# Altium PCB PCB1.PcbDoc (part 2 of 2)
Units mil, origin at the board's own origin, x right, y up, seen from the top; angles counter-clockwise.
Board outline 6000 x 4000 mil, 2 copper layers (Top Layer, Bottom Layer); 5 components, 75 nets, 178 pads, 23 vias.
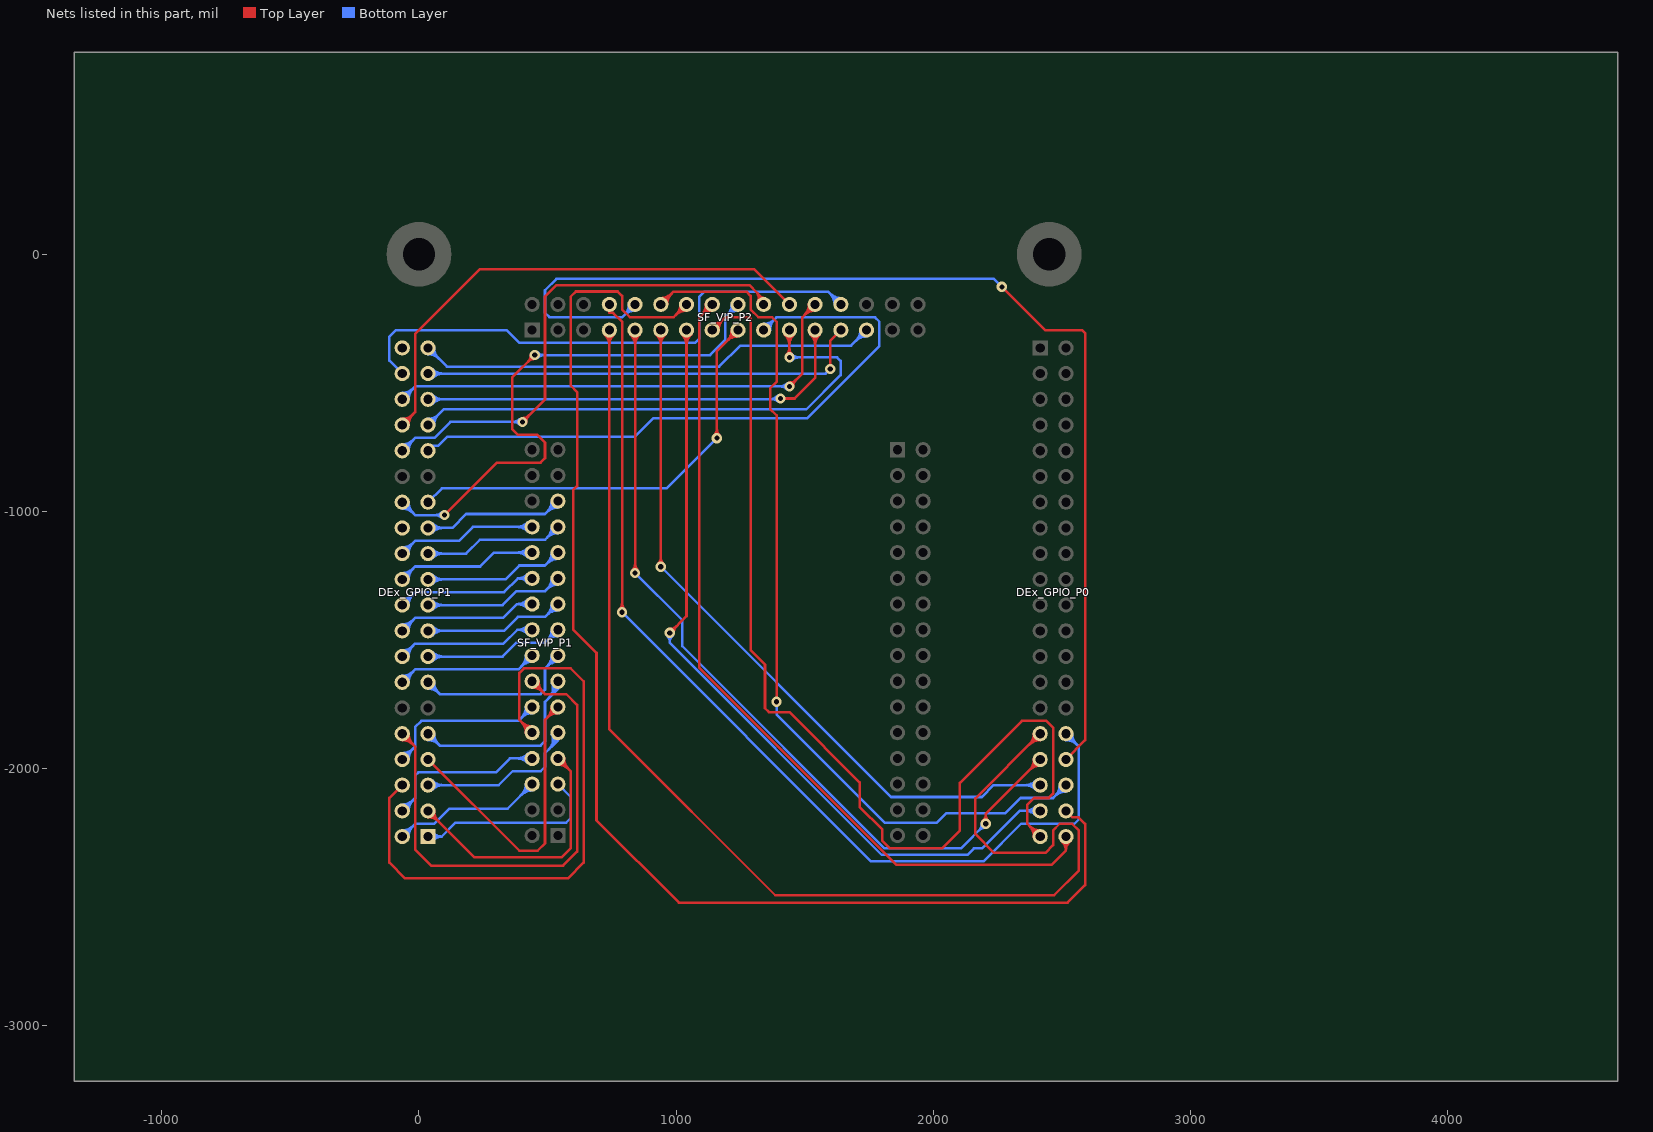
[diagram p2: the nets of this part, all layers, seen from the top]

## Via types
v1: diameter 40, hole 20, Top Layer to Bottom Layer, 23 vias

## Nets (pads, with @x,y where several pads share a name; then routed paths per layer and width w, separated by ;. In a path a pad name is that pad's centre, name@x,y a point inside that pad or via, vN(x,y) a via of type N, cw(c..) or ccw(c..) an arc to the next point about the centre after c; other vN are vias at no path point) (continued)
GPIO_0_26: DEx_GPIO_P0.31 SF_VIP_P2.7 | length 5153.7
  Top Layer w10: SF_VIP_P2.7@722.66,-312.34 cw(c680.79,-354.21) 740,-354.21 cw(c799.21,-354.21) SF_VIP_P2.7@757.34,-312.34 ; SF_VIP_P2.7@729.73,-305.27 cw(c704.93,-330.07) 740,-330.07 cw(c775.07,-330.07) SF_VIP_P2.7@750.27,-305.27 ; SF_VIP_P2.7@740,-295 740,-1847 1385,-2492 2469,-2492 2565,-2396 2565,-2240 2539,-2214 2491,-2214 2465,-2240 2465,-2297 2435,-2327 2236,-2327 2163,-2254 2163,-2116 DEx_GPIO_P0.31@2415,-1864 ; DEx_GPIO_P0.31@2390.47,-1864 cw(c2331.26,-1864) 2373.13,-1905.87 cw(c2415,-1947.74) DEx_GPIO_P0.31@2415,-1888.53 ; DEx_GPIO_P0.31@2400.47,-1864 cw(c2365.4,-1864) 2390.2,-1888.8 cw(c2415,-1913.6) DEx_GPIO_P0.31@2415,-1878.53
GPIO_0_27: DEx_GPIO_P0.32 SF_VIP_P2.8 | length 4028.4
  Top Layer w10: SF_VIP_P2.8@740,-195 740,-227.74 754.88,-227.74 789.53,-262.38 v1(789.53,-1391.7) ; v1@778.92,-1381.09 ccw(c753.31,-1355.48) 789.53,-1355.48 ccw(c825.74,-1355.48) v1@800.13,-1381.09
  Bottom Layer w10: v1(789.53,-1391.7) 1757.83,-2360 2194.57,-2360 2340.57,-2214 2547.5,-2214 2565,-2196.5 2565,-1914 DEx_GPIO_P0.32@2515,-1864 ; DEx_GPIO_P0.32@2515,-1888.53 cw(c2515,-1947.74) 2556.87,-1905.87 cw(c2598.74,-1864) DEx_GPIO_P0.32@2539.53,-1864 ; DEx_GPIO_P0.32@2515,-1878.53 cw(c2515,-1913.6) 2539.8,-1888.8 cw(c2564.6,-1864) DEx_GPIO_P0.32@2529.53,-1864
GPIO_0_28: DEx_GPIO_P0.33 SF_VIP_P2.9 | length 3654.2
  Top Layer w10: SF_VIP_P2.9@822.66,-312.34 cw(c780.79,-354.21) 840,-354.21 cw(c899.21,-354.21) SF_VIP_P2.9@857.34,-312.34 ; v1@829.39,-1228.3 ccw(c803.79,-1202.69) 840,-1202.69 ccw(c876.21,-1202.69) v1@850.61,-1228.3 ; SF_VIP_P2.9@829.73,-305.27 cw(c804.93,-330.07) 840,-330.07 cw(c875.07,-330.07) SF_VIP_P2.9@850.27,-305.27 ; v1(840,-1238.91) SF_VIP_P2.9@840,-295 ; v1@2192.39,-2203.39 ccw(c2166.79,-2177.79) 2203,-2177.79 ccw(c2239.21,-2177.79) v1@2213.61,-2203.39 ; v1(2203,-2214) 2203,-2176 DEx_GPIO_P0.33@2415,-1964 ; DEx_GPIO_P0.33@2390.47,-1964 cw(c2331.26,-1964) 2373.13,-2005.87 cw(c2415,-2047.74) DEx_GPIO_P0.33@2415,-1988.53 ; DEx_GPIO_P0.33@2400.47,-1964 cw(c2365.4,-1964) 2390.2,-1988.8 cw(c2415,-2013.6) DEx_GPIO_P0.33@2415,-1978.53
  Bottom Layer w10: v1(840,-1238.91) 1024.02,-1422.93 1024.02,-1524.02 1810,-2310 2107,-2310 v1(2203,-2214) ; v1@2188,-2214 cw(c2151.79,-2214) 2177.39,-2239.61 cw(c2203,-2265.21) v1@2203,-2229
GPIO_0_29: DEx_GPIO_P0.34 SF_VIP_P2.10 | length 4507.3
  Top Layer w10: v1(2266,-127) 2434,-295 2578,-295 2590,-307 2590,-1889 DEx_GPIO_P0.34@2515,-1964
  Bottom Layer w10: SF_VIP_P2.10@815.47,-195 cw(c756.26,-195) 798.13,-236.87 cw(c840,-278.74) SF_VIP_P2.10@840,-219.53 ; SF_VIP_P2.10@825.47,-195 cw(c790.4,-195) 815.2,-219.8 cw(c840,-244.6) SF_VIP_P2.10@840,-209.53 ; SF_VIP_P2.10@840,-195 790.47,-244.53 507.03,-244.53 490,-227.5 490,-140 534.53,-95.47 2234.47,-95.47 v1(2266,-127)
GPIO_0_30: DEx_GPIO_P0.35 SF_VIP_P2.11 | length 3137.9
  Top Layer w10: SF_VIP_P2.11@922.66,-312.34 cw(c880.79,-354.21) 940,-354.21 cw(c999.21,-354.21) SF_VIP_P2.11@957.34,-312.34 ; v1@929.39,-1204.39 ccw(c903.79,-1178.79) 940,-1178.79 ccw(c976.21,-1178.79) v1@950.61,-1204.39 ; SF_VIP_P2.11@929.73,-305.27 cw(c904.93,-330.07) 940,-330.07 cw(c975.07,-330.07) SF_VIP_P2.11@950.27,-305.27 ; v1(940,-1215) SF_VIP_P2.11@940,-295
  Bottom Layer w10: v1(940,-1215) 1835,-2110 2188,-2110 2234,-2064 DEx_GPIO_P0.35@2415,-2064 ; DEx_GPIO_P0.35@2397.66,-2081.34 ccw(c2355.79,-2123.21) 2355.79,-2064 ccw(c2355.79,-2004.79) DEx_GPIO_P0.35@2397.66,-2046.66 ; DEx_GPIO_P0.35@2404.73,-2074.27 ccw(c2379.93,-2099.07) 2379.93,-2064 ccw(c2379.93,-2028.93) DEx_GPIO_P0.35@2404.73,-2053.73
GPIO_0_31: DEx_GPIO_P0.36 SF_VIP_P2.12 | length 3753.4
  Top Layer w10: SF_VIP_P2.12@940,-195 989.53,-145.47 1272.5,-145.47 1289.53,-162.5 1289.53,-214.57 1319.96,-245 1372.5,-245 1390,-262.5 1390,-496 1365,-521 1365,-601 1390,-626 v1(1390,-1740) ; SF_VIP_P2.12@940,-180.47 ccw(c940,-145.4) 964.8,-170.2 ccw(c989.6,-195) SF_VIP_P2.12@954.53,-195 ; SF_VIP_P2.12@940,-170.47 ccw(c940,-111.26) 981.87,-153.13 ccw(c1023.74,-195) SF_VIP_P2.12@964.53,-195
  Bottom Layer w10: v1(1390,-1740) 1390,-1790 1810,-2210 2013,-2210 2049,-2174 2279,-2174 2339,-2114 2465,-2114 DEx_GPIO_P0.36@2515,-2064 ; DEx_GPIO_P0.36@2490.47,-2064 cw(c2431.26,-2064) 2473.13,-2105.87 cw(c2515,-2147.74) DEx_GPIO_P0.36@2515,-2088.53 ; DEx_GPIO_P0.36@2500.47,-2064 cw(c2465.4,-2064) 2490.2,-2088.8 cw(c2515,-2113.6) DEx_GPIO_P0.36@2515,-2078.53
GPIO_0_32: DEx_GPIO_P0.37 SF_VIP_P2.13 | length 3505
  Top Layer w10: v1(975,-1472) 1040,-1407 SF_VIP_P2.13@1040,-295 ; v1@975,-1457 ccw(c975,-1420.79) 1000.61,-1446.39 ccw(c1026.21,-1472) v1@990,-1472 ; SF_VIP_P2.13@1022.66,-312.34 cw(c980.79,-354.21) 1040,-354.21 cw(c1099.21,-354.21) SF_VIP_P2.13@1057.34,-312.34 ; SF_VIP_P2.13@1029.73,-305.27 cw(c1004.93,-330.07) 1040,-330.07 cw(c1075.07,-330.07) SF_VIP_P2.13@1050.27,-305.27
  Bottom Layer w10: v1@964.39,-1482.61 cw(c938.79,-1508.21) 975,-1508.21 cw(c1011.21,-1508.21) v1@985.61,-1482.61 ; v1(975,-1472) 975,-1511 1799,-2335 2132,-2335 2157,-2310 2189,-2310 2335,-2164 DEx_GPIO_P0.37@2415,-2164 ; DEx_GPIO_P0.37@2397.66,-2181.34 ccw(c2355.79,-2223.21) 2355.79,-2164 ccw(c2355.79,-2104.79) DEx_GPIO_P0.37@2397.66,-2146.66 ; DEx_GPIO_P0.37@2404.73,-2174.27 ccw(c2379.93,-2199.07) 2379.93,-2164 ccw(c2379.93,-2128.93) DEx_GPIO_P0.37@2404.73,-2153.73
GPIO_0_33: DEx_GPIO_P0.38 SF_VIP_P2.14 | length 5184.2
  Top Layer w10: SF_VIP_P2.14@1015.47,-195 cw(c956.26,-195) 998.13,-236.87 cw(c1040,-278.74) SF_VIP_P2.14@1040,-219.53 ; SF_VIP_P2.14@1025.47,-195 cw(c990.4,-195) 1015.2,-219.8 cw(c1040,-244.6) SF_VIP_P2.14@1040,-209.53 ; SF_VIP_P2.14@1040,-195 990,-245 819.96,-245 790,-215.04 790,-162.5 772.5,-145 610,-145 590,-165 590,-511 615,-536 615,-901 599,-917 599,-1459 690,-1550 690,-2201 1010,-2521 2521,-2521 2590,-2452 2590,-2215 2564,-2189 2540,-2189 DEx_GPIO_P0.38@2515,-2164
GPIO_0_34: DEx_GPIO_P0.39 SF_VIP_P2.15 | length 4277.6
  Top Layer w10: SF_VIP_P2.15@1140,-295 1190,-245 1284.6,-245 1290.26,-250.66 1290.26,-1540.26 1345,-1595 1345,-1765 1360,-1780 1440,-1780 1713,-2053 1713,-2148.36 1801.25,-2236.61 1801.25,-2280.25 1831,-2310 2033,-2310 2103,-2240 2103,-2054.92 2343.92,-1814 2439,-1814 2465,-1840 2465,-2096.5 2447.5,-2114 2391,-2114 2365,-2140 2365,-2214 DEx_GPIO_P0.39@2415,-2264 ; SF_VIP_P2.15@1140,-280.47 ccw(c1140,-245.4) 1164.8,-270.2 ccw(c1189.6,-295) SF_VIP_P2.15@1154.53,-295 ; SF_VIP_P2.15@1140,-270.47 ccw(c1140,-211.26) 1181.87,-253.13 ccw(c1223.74,-295) SF_VIP_P2.15@1164.53,-295 ; DEx_GPIO_P0.39@2390.47,-2264 ccw(c2331.26,-2264) 2373.13,-2222.13 ccw(c2415,-2180.26) DEx_GPIO_P0.39@2415,-2239.47 ; DEx_GPIO_P0.39@2400.47,-2264 ccw(c2365.4,-2264) 2390.2,-2239.2 ccw(c2415,-2214.4) DEx_GPIO_P0.39@2415,-2249.47
GPIO_0_35: DEx_GPIO_P0.40 SF_VIP_P2.16 | length 3528.6
  Top Layer w10: SF_VIP_P2.16@1115.47,-195 cw(c1056.26,-195) 1098.13,-236.87 cw(c1140,-278.74) SF_VIP_P2.16@1140,-219.53 ; SF_VIP_P2.16@1125.47,-195 cw(c1090.4,-195) 1115.2,-219.8 cw(c1140,-244.6) SF_VIP_P2.16@1140,-209.53 ; SF_VIP_P2.16@1140,-195 1090,-245 1090,-1608 1855,-2373 2460,-2373 2515,-2318 ; DEx_GPIO_P0.40@2498.86,-2282.47 cw(c2467.82,-2318) 2515,-2318 ; DEx_GPIO_P0.40@2505.44,-2274.94 cw(c2487.06,-2295.98) 2515,-2295.98 cw(c2542.94,-2295.98) DEx_GPIO_P0.40@2524.56,-2274.94 ; DEx_GPIO_P0.40@2515,-2264 2515,-2318 ; DEx_GPIO_P0.40@2531.14,-2282.47 ccw(c2562.18,-2318) 2515,-2318
GPIO_1_0: DEx_GPIO_P1.1 SF_VIP_P1.5 | length 864.1
  Bottom Layer w10: DEx_GPIO_P1.1@35,-2264 88.53,-2264 ; DEx_GPIO_P1.1@46,-2273.49 cw(c66.7,-2291.33) 66.7,-2264 cw(c66.7,-2236.67) DEx_GPIO_P1.1@46,-2254.51 ; DEx_GPIO_P1.1@53.58,-2280.01 cw(c88.53,-2310.14) 88.53,-2264 ; DEx_GPIO_P1.1@53.58,-2247.99 ccw(c88.53,-2217.86) 88.53,-2264 ; SF_VIP_P1.5@540,-2060 590,-2110 590,-2192.5 572.5,-2210 142.53,-2210 88.53,-2264
GPIO_1_1: DEx_GPIO_P1.2 SF_VIP_P1.6 | length 885.7
  Bottom Layer w10: DEx_GPIO_P1.2@-65,-2264 -14.53,-2213.53 60,-2213.53 118.53,-2155 345,-2155 SF_VIP_P1.6@440,-2060 ; DEx_GPIO_P1.2@-65,-2249.47 ccw(c-65,-2214.4) -40.2,-2239.2 ccw(c-15.4,-2264) DEx_GPIO_P1.2@-50.47,-2264 ; DEx_GPIO_P1.2@-65,-2239.47 ccw(c-65,-2180.26) -23.13,-2222.13 ccw(c18.74,-2264) DEx_GPIO_P1.2@-40.47,-2264 ; SF_VIP_P1.6@415.47,-2060 cw(c356.26,-2060) 398.13,-2101.87 cw(c440,-2143.74) SF_VIP_P1.6@440,-2084.53 ; SF_VIP_P1.6@425.47,-2060 cw(c390.4,-2060) 415.2,-2084.8 cw(c440,-2109.6) SF_VIP_P1.6@440,-2074.53
GPIO_1_2: DEx_GPIO_P1.3 SF_VIP_P1.7 | length 1310.4
  Top Layer w10: DEx_GPIO_P1.3@35,-2188.53 cw(c35,-2247.74) 76.87,-2205.87 cw(c118.74,-2164) DEx_GPIO_P1.3@59.53,-2164 ; DEx_GPIO_P1.3@35,-2178.53 cw(c35,-2213.6) 59.8,-2188.8 cw(c84.6,-2164) DEx_GPIO_P1.3@49.53,-2164 ; DEx_GPIO_P1.3@35,-2164 216,-2345 554.06,-2345 589.53,-2309.53 589.53,-2009.53 SF_VIP_P1.7@540,-1960 ; SF_VIP_P1.7@540,-1984.53 cw(c540,-2043.74) 581.87,-2001.87 cw(c623.74,-1960) SF_VIP_P1.7@564.53,-1960 ; SF_VIP_P1.7@540,-1974.53 cw(c540,-2009.6) 564.8,-1984.8 cw(c589.6,-1960) SF_VIP_P1.7@554.53,-1960
GPIO_1_3: DEx_GPIO_P1.4 SF_VIP_P1.8 | length 937
  Bottom Layer w10: DEx_GPIO_P1.4@-65,-2164 -15,-2114 -15,-2026.5 -2.5,-2014 299,-2014 353,-1960 SF_VIP_P1.8@440,-1960 ; DEx_GPIO_P1.4@-65,-2149.47 ccw(c-65,-2114.4) -40.2,-2139.2 ccw(c-15.4,-2164) DEx_GPIO_P1.4@-50.47,-2164 ; DEx_GPIO_P1.4@-65,-2139.47 ccw(c-65,-2080.26) -23.13,-2122.13 ccw(c18.74,-2164) DEx_GPIO_P1.4@-40.47,-2164 ; SF_VIP_P1.8@422.66,-1977.34 ccw(c380.79,-2019.21) 380.79,-1960 ccw(c380.79,-1900.79) SF_VIP_P1.8@422.66,-1942.66 ; SF_VIP_P1.8@429.73,-1970.27 ccw(c404.93,-1995.07) 404.93,-1960 ccw(c404.93,-1924.93) SF_VIP_P1.8@429.73,-1949.73
GPIO_1_4: DEx_GPIO_P1.5 SF_VIP_P1.9 | length 981.4
  Bottom Layer w10: DEx_GPIO_P1.5@35,-2064 310,-2064 364,-2010 472.5,-2010 490,-1992.5 490,-1939.96 540,-1889.96 SF_VIP_P1.9@540,-1860 ; DEx_GPIO_P1.5@45.27,-2074.27 cw(c70.07,-2099.07) 70.07,-2064 cw(c70.07,-2028.93) DEx_GPIO_P1.5@45.27,-2053.73 ; DEx_GPIO_P1.5@52.34,-2081.34 cw(c94.21,-2123.21) 94.21,-2064 cw(c94.21,-2004.79) DEx_GPIO_P1.5@52.34,-2046.66 ; 504.98,-1924.98 ccw(c467.49,-1887.49) SF_VIP_P1.9@517.07,-1868.69 ; 515.92,-1914.04 ccw(c483.36,-1881.47) SF_VIP_P1.9@526.42,-1865.15 ; 526.86,-1903.1 ccw(c499.22,-1875.46) SF_VIP_P1.9@535.77,-1861.6 ; 537.79,-1892.16 ccw(c515.08,-1869.45) SF_VIP_P1.9@545.12,-1858.06
GPIO_1_5: DEx_GPIO_P1.6 SF_VIP_P1.10 | length 2511.5
  Top Layer w10: DEx_GPIO_P1.6@-65,-2064 -115,-2114 -115,-2365 -54,-2426 579,-2426 640,-2365 640,-1660 590,-1610 407.5,-1610 390,-1627.5 390,-1810 SF_VIP_P1.10@440,-1860 ; SF_VIP_P1.10@415.47,-1860 ccw(c356.26,-1860) 398.13,-1818.13 ccw(c440,-1776.26) SF_VIP_P1.10@440,-1835.47 ; SF_VIP_P1.10@425.47,-1860 ccw(c390.4,-1860) 415.2,-1835.2 ccw(c440,-1810.4) SF_VIP_P1.10@440,-1845.47
GPIO_1_6: DEx_GPIO_P1.7 SF_VIP_P1.11 | length 1312.9
  Top Layer w10: DEx_GPIO_P1.7@35,-1964 390,-2319 461,-2319 490,-2290 490,-1810 SF_VIP_P1.11@540,-1760 ; SF_VIP_P1.11@515.47,-1760 cw(c456.26,-1760) 498.13,-1801.87 cw(c540,-1843.74) SF_VIP_P1.11@540,-1784.53 ; SF_VIP_P1.11@525.47,-1760 cw(c490.4,-1760) 515.2,-1784.8 cw(c540,-1809.6) SF_VIP_P1.11@540,-1774.53
GPIO_1_7: DEx_GPIO_P1.8 SF_VIP_P1.12 | length 929.9
  Bottom Layer w10: DEx_GPIO_P1.8@-65,-1964 -15,-1914 -15,-1838.53 9.53,-1814 386,-1814 SF_VIP_P1.12@440,-1760 ; DEx_GPIO_P1.8@-65,-1949.47 ccw(c-65,-1914.4) -40.2,-1939.2 ccw(c-15.4,-1964) DEx_GPIO_P1.8@-50.47,-1964 ; DEx_GPIO_P1.8@-65,-1939.47 ccw(c-65,-1880.26) -23.13,-1922.13 ccw(c18.74,-1964) DEx_GPIO_P1.8@-40.47,-1964 ; SF_VIP_P1.12@415.47,-1760 cw(c356.26,-1760) 398.13,-1801.87 cw(c440,-1843.74) SF_VIP_P1.12@440,-1784.53 ; SF_VIP_P1.12@425.47,-1760 cw(c390.4,-1760) 415.2,-1784.8 cw(c440,-1809.6) SF_VIP_P1.12@440,-1774.53
GPIO_1_8: DEx_GPIO_P1.9 SF_VIP_P1.13 | length 1078.1
  Bottom Layer w10: DEx_GPIO_P1.9@35,-1888.53 cw(c35,-1947.74) 76.87,-1905.87 cw(c118.74,-1864) DEx_GPIO_P1.9@59.53,-1864 ; DEx_GPIO_P1.9@35,-1878.53 cw(c35,-1913.6) 59.8,-1888.8 cw(c84.6,-1864) DEx_GPIO_P1.9@49.53,-1864 ; DEx_GPIO_P1.9@35,-1864 81,-1910 472.5,-1910 490,-1892.5 490,-1739.96 540,-1689.96 SF_VIP_P1.13@540,-1660 ; 504.98,-1724.98 ccw(c467.49,-1687.49) SF_VIP_P1.13@517.07,-1668.69 ; 515.92,-1714.04 ccw(c483.36,-1681.47) SF_VIP_P1.13@526.42,-1665.15 ; 526.86,-1703.1 ccw(c499.22,-1675.46) SF_VIP_P1.13@535.77,-1661.6 ; 537.79,-1692.16 ccw(c515.08,-1669.45) SF_VIP_P1.13@545.12,-1658.06
GPIO_1_9: DEx_GPIO_P1.10 SF_VIP_P1.14 | length 2228.8
  Top Layer w10: DEx_GPIO_P1.10@-65,-1888.53 cw(c-65,-1947.74) -23.13,-1905.87 cw(c18.74,-1864) DEx_GPIO_P1.10@-40.47,-1864 ; DEx_GPIO_P1.10@-65,-1878.53 cw(c-65,-1913.6) -40.2,-1888.8 cw(c-15.4,-1864) DEx_GPIO_P1.10@-50.47,-1864 ; DEx_GPIO_P1.10@-65,-1864 -15,-1914 -15,-2315 47,-2377 560,-2377 614.53,-2322.47 614.53,-1752.03 572.5,-1710 490,-1710 SF_VIP_P1.14@440,-1660 ; SF_VIP_P1.14@440,-1684.53 cw(c440,-1743.74) 481.87,-1701.87 cw(c523.74,-1660) SF_VIP_P1.14@464.53,-1660 ; SF_VIP_P1.14@440,-1674.53 cw(c440,-1709.6) 464.8,-1684.8 cw(c489.6,-1660) SF_VIP_P1.14@454.53,-1660
GPIO_1_10: DEx_GPIO_P1.13 SF_VIP_P1.15 | length 930.7
  Bottom Layer w10: DEx_GPIO_P1.13@35,-1688.53 cw(c35,-1747.74) 76.87,-1705.87 cw(c118.74,-1664) DEx_GPIO_P1.13@59.53,-1664 ; DEx_GPIO_P1.13@35,-1678.53 cw(c35,-1713.6) 59.8,-1688.8 cw(c84.6,-1664) DEx_GPIO_P1.13@49.53,-1664 ; DEx_GPIO_P1.13@35,-1664 81,-1710 472.5,-1710 490,-1692.5 490,-1610 SF_VIP_P1.15@540,-1560 ; SF_VIP_P1.15@515.47,-1560 cw(c456.26,-1560) 498.13,-1601.87 cw(c540,-1643.74) SF_VIP_P1.15@540,-1584.53 ; SF_VIP_P1.15@525.47,-1560 cw(c490.4,-1560) 515.2,-1584.8 cw(c540,-1609.6) SF_VIP_P1.15@540,-1574.53
GPIO_1_11: DEx_GPIO_P1.14 SF_VIP_P1.16 | length 844.3
  Bottom Layer w10: DEx_GPIO_P1.14@-65,-1664 -15,-1614 386,-1614 SF_VIP_P1.16@440,-1560 ; DEx_GPIO_P1.14@-65,-1649.47 ccw(c-65,-1614.4) -40.2,-1639.2 ccw(c-15.4,-1664) DEx_GPIO_P1.14@-50.47,-1664 ; DEx_GPIO_P1.14@-65,-1639.47 ccw(c-65,-1580.26) -23.13,-1622.13 ccw(c18.74,-1664) DEx_GPIO_P1.14@-40.47,-1664 ; SF_VIP_P1.16@415.47,-1560 cw(c356.26,-1560) 398.13,-1601.87 cw(c440,-1643.74) SF_VIP_P1.16@440,-1584.53 ; SF_VIP_P1.16@425.47,-1560 cw(c390.4,-1560) 415.2,-1584.8 cw(c440,-1609.6) SF_VIP_P1.16@440,-1574.53
GPIO_1_12: DEx_GPIO_P1.15 SF_VIP_P1.17 | length 844.3
  Bottom Layer w10: DEx_GPIO_P1.15@35,-1564 325,-1564 379,-1510 490,-1510 SF_VIP_P1.17@540,-1460 ; DEx_GPIO_P1.15@45.27,-1574.27 cw(c70.07,-1599.07) 70.07,-1564 cw(c70.07,-1528.93) DEx_GPIO_P1.15@45.27,-1553.73 ; DEx_GPIO_P1.15@52.34,-1581.34 cw(c94.21,-1623.21) 94.21,-1564 cw(c94.21,-1504.79) DEx_GPIO_P1.15@52.34,-1546.66 ; SF_VIP_P1.17@515.47,-1460 cw(c456.26,-1460) 498.13,-1501.87 cw(c540,-1543.74) SF_VIP_P1.17@540,-1484.53 ; SF_VIP_P1.17@525.47,-1460 cw(c490.4,-1460) 515.2,-1484.8 cw(c540,-1509.6) SF_VIP_P1.17@540,-1474.53
GPIO_1_13: DEx_GPIO_P1.16 SF_VIP_P1.18 | length 839.7
  Bottom Layer w10: DEx_GPIO_P1.16@-65,-1564 -15,-1514 328,-1514 382,-1460 ; DEx_GPIO_P1.16@-65,-1549.47 ccw(c-65,-1514.4) -40.2,-1539.2 ccw(c-15.4,-1564) DEx_GPIO_P1.16@-50.47,-1564 ; DEx_GPIO_P1.16@-65,-1539.47 ccw(c-65,-1480.26) -23.13,-1522.13 ccw(c18.74,-1564) DEx_GPIO_P1.16@-40.47,-1564 ; SF_VIP_P1.18@422.4,-1477.08 ccw(c382,-1516.31) 382,-1460 ; SF_VIP_P1.18@422.4,-1442.92 cw(c382,-1403.69) 382,-1460 ; SF_VIP_P1.18@429.58,-1470.12 ccw(c405.65,-1493.35) 405.65,-1460 ccw(c405.65,-1426.65) SF_VIP_P1.18@429.58,-1449.88 ; SF_VIP_P1.18@440,-1460 382,-1460
GPIO_1_14: DEx_GPIO_P1.17 SF_VIP_P1.19 | length 844.3
  Bottom Layer w10: DEx_GPIO_P1.17@35,-1464 330,-1464 384,-1410 490,-1410 SF_VIP_P1.19@540,-1360 ; DEx_GPIO_P1.17@45.27,-1474.27 cw(c70.07,-1499.07) 70.07,-1464 cw(c70.07,-1428.93) DEx_GPIO_P1.17@45.27,-1453.73 ; DEx_GPIO_P1.17@52.34,-1481.34 cw(c94.21,-1523.21) 94.21,-1464 cw(c94.21,-1404.79) DEx_GPIO_P1.17@52.34,-1446.66 ; SF_VIP_P1.19@515.47,-1360 cw(c456.26,-1360) 498.13,-1401.87 cw(c540,-1443.74) SF_VIP_P1.19@540,-1384.53 ; SF_VIP_P1.19@525.47,-1360 cw(c490.4,-1360) 515.2,-1384.8 cw(c540,-1409.6) SF_VIP_P1.19@540,-1374.53
GPIO_1_15: DEx_GPIO_P1.18 SF_VIP_P1.20 | length 843.5
  Bottom Layer w10: DEx_GPIO_P1.18@-65,-1464 -15,-1414 327,-1414 381,-1360 ; DEx_GPIO_P1.18@-65,-1449.47 ccw(c-65,-1414.4) -40.2,-1439.2 ccw(c-15.4,-1464) DEx_GPIO_P1.18@-50.47,-1464 ; DEx_GPIO_P1.18@-65,-1439.47 ccw(c-65,-1380.26) -23.13,-1422.13 ccw(c18.74,-1464) DEx_GPIO_P1.18@-40.47,-1464 ; SF_VIP_P1.20@422.61,-1377.3 ccw(c381,-1418.69) 381,-1360 ; SF_VIP_P1.20@422.61,-1342.7 cw(c381,-1301.31) 381,-1360 ; SF_VIP_P1.20@429.7,-1370.25 ccw(c405.06,-1394.76) 405.06,-1360 ccw(c405.06,-1325.24) SF_VIP_P1.20@429.7,-1349.75 ; SF_VIP_P1.20@440,-1360 381,-1360
GPIO_1_16: DEx_GPIO_P1.19 SF_VIP_P1.21 | length 844.3
  Bottom Layer w10: DEx_GPIO_P1.19@35,-1364 325,-1364 379,-1310 490,-1310 SF_VIP_P1.21@540,-1260 ; DEx_GPIO_P1.19@45.27,-1374.27 cw(c70.07,-1399.07) 70.07,-1364 cw(c70.07,-1328.93) DEx_GPIO_P1.19@45.27,-1353.73 ; DEx_GPIO_P1.19@52.34,-1381.34 cw(c94.21,-1423.21) 94.21,-1364 cw(c94.21,-1304.79) DEx_GPIO_P1.19@52.34,-1346.66 ; SF_VIP_P1.21@515.47,-1260 cw(c456.26,-1260) 498.13,-1301.87 cw(c540,-1343.74) SF_VIP_P1.21@540,-1284.53 ; SF_VIP_P1.21@525.47,-1260 cw(c490.4,-1260) 515.2,-1284.8 cw(c540,-1309.6) SF_VIP_P1.21@540,-1274.53
GPIO_1_17: DEx_GPIO_P1.20 SF_VIP_P1.22 | length 828.2
  Bottom Layer w10: DEx_GPIO_P1.20@-65,-1364 -15,-1314 331,-1314 385,-1260 ; DEx_GPIO_P1.20@-65,-1349.47 ccw(c-65,-1314.4) -40.2,-1339.2 ccw(c-15.4,-1364) DEx_GPIO_P1.20@-50.47,-1364 ; DEx_GPIO_P1.20@-65,-1339.47 ccw(c-65,-1280.26) -23.13,-1322.13 ccw(c18.74,-1364) DEx_GPIO_P1.20@-40.47,-1364 ; SF_VIP_P1.22@421.75,-1276.39 ccw(c385,-1309.39) 385,-1260 ; SF_VIP_P1.22@421.75,-1243.61 cw(c385,-1210.61) 385,-1260 ; SF_VIP_P1.22@429.19,-1269.71 ccw(c407.43,-1289.26) 407.43,-1260 ccw(c407.43,-1230.74) SF_VIP_P1.22@429.19,-1250.29 ; SF_VIP_P1.22@440,-1260 385,-1260
GPIO_1_18: DEx_GPIO_P1.21 SF_VIP_P1.23 | length 844.3
  Bottom Layer w10: DEx_GPIO_P1.21@35,-1264 336,-1264 390,-1210 490,-1210 SF_VIP_P1.23@540,-1160 ; DEx_GPIO_P1.21@45.27,-1274.27 cw(c70.07,-1299.07) 70.07,-1264 cw(c70.07,-1228.93) DEx_GPIO_P1.21@45.27,-1253.73 ; DEx_GPIO_P1.21@52.34,-1281.34 cw(c94.21,-1323.21) 94.21,-1264 cw(c94.21,-1204.79) DEx_GPIO_P1.21@52.34,-1246.66 ; SF_VIP_P1.23@515.47,-1160 cw(c456.26,-1160) 498.13,-1201.87 cw(c540,-1243.74) SF_VIP_P1.23@540,-1184.53 ; SF_VIP_P1.23@525.47,-1160 cw(c490.4,-1160) 515.2,-1184.8 cw(c540,-1209.6) SF_VIP_P1.23@540,-1174.53
GPIO_1_19: DEx_GPIO_P1.22 SF_VIP_P1.24 | length 844.3
  Bottom Layer w10: DEx_GPIO_P1.22@-65,-1264 -15,-1214 238,-1214 292,-1160 SF_VIP_P1.24@440,-1160 ; DEx_GPIO_P1.22@-65,-1249.47 ccw(c-65,-1214.4) -40.2,-1239.2 ccw(c-15.4,-1264) DEx_GPIO_P1.22@-50.47,-1264 ; DEx_GPIO_P1.22@-65,-1239.47 ccw(c-65,-1180.26) -23.13,-1222.13 ccw(c18.74,-1264) DEx_GPIO_P1.22@-40.47,-1264 ; SF_VIP_P1.24@422.66,-1177.34 ccw(c380.79,-1219.21) 380.79,-1160 ccw(c380.79,-1100.79) SF_VIP_P1.24@422.66,-1142.66 ; SF_VIP_P1.24@429.73,-1170.27 ccw(c404.93,-1195.07) 404.93,-1160 ccw(c404.93,-1124.93) SF_VIP_P1.24@429.73,-1149.73
GPIO_1_20: DEx_GPIO_P1.23 SF_VIP_P1.25 | length 844.3
  Bottom Layer w10: DEx_GPIO_P1.23@35,-1164 183,-1164 237,-1110 490,-1110 SF_VIP_P1.25@540,-1060 ; DEx_GPIO_P1.23@45.27,-1174.27 cw(c70.07,-1199.07) 70.07,-1164 cw(c70.07,-1128.93) DEx_GPIO_P1.23@45.27,-1153.73 ; DEx_GPIO_P1.23@52.34,-1181.34 cw(c94.21,-1223.21) 94.21,-1164 cw(c94.21,-1104.79) DEx_GPIO_P1.23@52.34,-1146.66 ; SF_VIP_P1.25@515.47,-1060 cw(c456.26,-1060) 498.13,-1101.87 cw(c540,-1143.74) SF_VIP_P1.25@540,-1084.53 ; SF_VIP_P1.25@525.47,-1060 cw(c490.4,-1060) 515.2,-1084.8 cw(c540,-1109.6) SF_VIP_P1.25@540,-1074.53
GPIO_1_21: DEx_GPIO_P1.24 SF_VIP_P1.26 | length 844.3
  Bottom Layer w10: DEx_GPIO_P1.24@-65,-1164 -15,-1114 156,-1114 210,-1060 SF_VIP_P1.26@440,-1060 ; DEx_GPIO_P1.24@-65,-1149.47 ccw(c-65,-1114.4) -40.2,-1139.2 ccw(c-15.4,-1164) DEx_GPIO_P1.24@-50.47,-1164 ; DEx_GPIO_P1.24@-65,-1139.47 ccw(c-65,-1080.26) -23.13,-1122.13 ccw(c18.74,-1164) DEx_GPIO_P1.24@-40.47,-1164 ; SF_VIP_P1.26@422.66,-1077.34 ccw(c380.79,-1119.21) 380.79,-1060 ccw(c380.79,-1000.79) SF_VIP_P1.26@422.66,-1042.66 ; SF_VIP_P1.26@429.73,-1070.27 ccw(c404.93,-1095.07) 404.93,-1060 ccw(c404.93,-1024.93) SF_VIP_P1.26@429.73,-1049.73
GPIO_1_22: DEx_GPIO_P1.25 SF_VIP_P1.27 | length 844.3
  Bottom Layer w10: DEx_GPIO_P1.25@35,-1064 129.53,-1064 183.53,-1010 490,-1010 SF_VIP_P1.27@540,-960 ; DEx_GPIO_P1.25@45.27,-1074.27 cw(c70.07,-1099.07) 70.07,-1064 cw(c70.07,-1028.93) DEx_GPIO_P1.25@45.27,-1053.73 ; DEx_GPIO_P1.25@52.34,-1081.34 cw(c94.21,-1123.21) 94.21,-1064 cw(c94.21,-1004.79) DEx_GPIO_P1.25@52.34,-1046.66 ; SF_VIP_P1.27@515.47,-960 cw(c456.26,-960) 498.13,-1001.87 cw(c540,-1043.74) SF_VIP_P1.27@540,-984.53 ; SF_VIP_P1.27@525.47,-960 cw(c490.4,-960) 515.2,-984.8 cw(c540,-1009.6) SF_VIP_P1.27@540,-974.53
GPIO_1_23: DEx_GPIO_P1.26
GPIO_1_24: DEx_GPIO_P1.27 SF_VIP_P2.17 | length 1885.1
  Top Layer w10: v1@1147.39,-704.39 ccw(c1121.79,-678.79) 1158,-678.79 ccw(c1194.21,-678.79) v1@1168.61,-704.39 ; v1(1158,-715) 1158,-377 SF_VIP_P2.17@1240,-295 ; SF_VIP_P2.17@1215.47,-295 cw(c1156.26,-295) 1198.13,-336.87 cw(c1240,-378.74) SF_VIP_P2.17@1240,-319.53 ; SF_VIP_P2.17@1225.47,-295 cw(c1190.4,-295) 1215.2,-319.8 cw(c1240,-344.6) SF_VIP_P2.17@1240,-309.53
  Bottom Layer w10: DEx_GPIO_P1.27@35,-964 89,-910 963,-910 v1(1158,-715)
GPIO_1_25: DEx_GPIO_P1.28 SF_VIP_P2.18 | length 2592
  Top Layer w10: v1(99,-1014) 303,-810 472.5,-810 490,-792.5 490,-732 460,-702 385,-702 362,-679 362,-480 v1(450,-392) ; v1@435,-392 cw(c398.79,-392) 424.39,-417.61 cw(c450,-443.21) v1@450,-407
  Bottom Layer w10: DEx_GPIO_P1.28@-65,-988.53 cw(c-65,-1047.74) -23.13,-1005.87 cw(c18.74,-964) DEx_GPIO_P1.28@-40.47,-964 ; DEx_GPIO_P1.28@-65,-978.53 cw(c-65,-1013.6) -40.2,-988.8 cw(c-15.4,-964) DEx_GPIO_P1.28@-50.47,-964 ; DEx_GPIO_P1.28@-65,-964 -15,-1014 v1(99,-1014) ; v1@88.39,-1024.61 ccw(c62.79,-1050.21) 62.79,-1014 ccw(c62.79,-977.79) v1@88.39,-1003.39 ; v1(450,-392) 1132,-392 1190,-334 1190,-245 SF_VIP_P2.18@1240,-195 ; v1@460.61,-402.61 cw(c486.21,-428.21) 486.21,-392 cw(c486.21,-355.79) v1@460.61,-381.39 ; SF_VIP_P2.18@1215.47,-195 cw(c1156.26,-195) 1198.13,-236.87 cw(c1240,-278.74) SF_VIP_P2.18@1240,-219.53 ; SF_VIP_P2.18@1225.47,-195 cw(c1190.4,-195) 1215.2,-219.8 cw(c1240,-244.6) SF_VIP_P2.18@1240,-209.53
GPIO_1_26: DEx_GPIO_P1.31 SF_VIP_P2.19 | length 2643.2
  Bottom Layer w10: DEx_GPIO_P1.31@35,-764 55.11,-743.89 75.64,-743.89 109.53,-710 838,-710 910,-638 1508,-638 1790,-356 1790,-262.5 1772.97,-245.47 1389.53,-245.47 SF_VIP_P2.19@1340,-295 ; SF_VIP_P2.19@1340,-280.47 ccw(c1340,-245.4) 1364.8,-270.2 ccw(c1389.6,-295) SF_VIP_P2.19@1354.53,-295 ; SF_VIP_P2.19@1340,-270.47 ccw(c1340,-211.26) 1381.87,-253.13 ccw(c1423.74,-295) SF_VIP_P2.19@1364.53,-295
GPIO_1_27: DEx_GPIO_P1.32 SF_VIP_P2.20 | length 2324.5
  Top Layer w10: v1(402,-652) 490,-564 490,-165 535,-120 1285,-120 1315,-150 ; v1@402,-637 ccw(c402,-600.79) 427.61,-626.39 ccw(c453.21,-652) v1@417,-652 ; SF_VIP_P2.20@1317.24,-185.85 ccw(c1278.5,-170.28) 1315,-150 ; SF_VIP_P2.20@1326.52,-189.58 ccw(c1303.58,-180.36) 1325.19,-168.35 ccw(c1346.81,-156.34) SF_VIP_P2.20@1342.52,-180.69 ; SF_VIP_P2.20@1340,-195 1315,-150 ; SF_VIP_P2.20@1344.26,-170.84 cw(c1351.5,-129.72) 1315,-150
  Bottom Layer w10: DEx_GPIO_P1.32@-65,-764 -15,-714 60.53,-714 122.53,-652 v1(402,-652) ; DEx_GPIO_P1.32@-65,-749.47 ccw(c-65,-714.4) -40.2,-739.2 ccw(c-15.4,-764) DEx_GPIO_P1.32@-50.47,-764 ; DEx_GPIO_P1.32@-65,-739.47 ccw(c-65,-680.26) -23.13,-722.13 ccw(c18.74,-764) DEx_GPIO_P1.32@-40.47,-764 ; v1@391.39,-662.61 ccw(c365.79,-688.21) 365.79,-652 ccw(c365.79,-615.79) v1@391.39,-641.39
GPIO_1_28: DEx_GPIO_P1.33 SF_VIP_P2.21 | length 2459.8
  Top Layer w10: SF_VIP_P2.21@1422.66,-312.34 cw(c1380.79,-354.21) 1440,-354.21 cw(c1499.21,-354.21) SF_VIP_P2.21@1457.34,-312.34 ; v1@1429.39,-390.39 ccw(c1403.79,-364.79) 1440,-364.79 ccw(c1476.21,-364.79) v1@1450.61,-390.39 ; SF_VIP_P2.21@1429.73,-305.27 cw(c1404.93,-330.07) 1440,-330.07 cw(c1475.07,-330.07) SF_VIP_P2.21@1450.27,-305.27 ; v1(1440,-401) SF_VIP_P2.21@1440,-295
  Bottom Layer w10: DEx_GPIO_P1.33@35,-664 96,-603 1505.5,-603 1639,-469.5 1639,-415 1625,-401 v1(1440,-401) ; DEx_GPIO_P1.33@35,-649.47 ccw(c35,-614.4) 59.8,-639.2 ccw(c84.6,-664) DEx_GPIO_P1.33@49.53,-664 ; DEx_GPIO_P1.33@35,-639.47 ccw(c35,-580.26) 76.87,-622.13 ccw(c118.74,-664) DEx_GPIO_P1.33@59.53,-664 ; v1@1450.61,-411.61 cw(c1476.21,-437.21) 1476.21,-401 cw(c1476.21,-364.79) v1@1450.61,-390.39
GPIO_1_29: DEx_GPIO_P1.34 SF_VIP_P2.22 | length 2138.7
  Top Layer w10: DEx_GPIO_P1.34@-65,-664 -15,-614 -15,-310.36 237.36,-58 1303,-58 SF_VIP_P2.22@1440,-195 ; DEx_GPIO_P1.34@-65,-649.47 ccw(c-65,-614.4) -40.2,-639.2 ccw(c-15.4,-664) DEx_GPIO_P1.34@-50.47,-664 ; DEx_GPIO_P1.34@-65,-639.47 ccw(c-65,-580.26) -23.13,-622.13 ccw(c18.74,-664) DEx_GPIO_P1.34@-40.47,-664
GPIO_1_30: DEx_GPIO_P1.35 SF_VIP_P2.23 | length 2078.5
  Top Layer w10: v1(1405,-561) 1460,-561 1540,-481 SF_VIP_P2.23@1540,-295 ; SF_VIP_P2.23@1522.66,-312.34 cw(c1480.79,-354.21) 1540,-354.21 cw(c1599.21,-354.21) SF_VIP_P2.23@1557.34,-312.34 ; SF_VIP_P2.23@1529.73,-305.27 cw(c1504.93,-330.07) 1540,-330.07 cw(c1575.07,-330.07) SF_VIP_P2.23@1550.27,-305.27
  Bottom Layer w10: DEx_GPIO_P1.35@35,-564 1402,-564 v1(1405,-561) ; DEx_GPIO_P1.35@45.27,-574.27 cw(c70.07,-599.07) 70.07,-564 cw(c70.07,-528.93) DEx_GPIO_P1.35@45.27,-553.73 ; DEx_GPIO_P1.35@52.34,-581.34 cw(c94.21,-623.21) 94.21,-564 cw(c94.21,-504.79) DEx_GPIO_P1.35@52.34,-546.66 ; 1361.54,-564 ccw(c1361.54,-517.54) v1@1394.39,-550.39 ; 1376.03,-564 cw(c1376.03,-589.97) v1@1394.39,-571.61
GPIO_1_31: DEx_GPIO_P1.36 SF_VIP_P2.24 | length 2296.1
  Top Layer w10: v1(1440,-514) 1490,-464 1490,-245 SF_VIP_P2.24@1540,-195 ; v1@1440,-499 ccw(c1440,-462.79) 1465.61,-488.39 ccw(c1491.21,-514) v1@1455,-514 ; SF_VIP_P2.24@1515.47,-195 cw(c1456.26,-195) 1498.13,-236.87 cw(c1540,-278.74) SF_VIP_P2.24@1540,-219.53 ; SF_VIP_P2.24@1525.47,-195 cw(c1490.4,-195) 1515.2,-219.8 cw(c1540,-244.6) SF_VIP_P2.24@1540,-209.53
  Bottom Layer w10: DEx_GPIO_P1.36@-65,-564 -15,-514 v1(1440,-514) ; DEx_GPIO_P1.36@-65,-549.47 ccw(c-65,-514.4) -40.2,-539.2 ccw(c-15.4,-564) DEx_GPIO_P1.36@-50.47,-564 ; DEx_GPIO_P1.36@-65,-539.47 ccw(c-65,-480.26) -23.13,-522.13 ccw(c18.74,-564) DEx_GPIO_P1.36@-40.47,-564 ; v1@1429.39,-524.61 ccw(c1403.79,-550.21) 1403.79,-514 ccw(c1403.79,-477.79) v1@1429.39,-503.39
GPIO_1_32: DEx_GPIO_P1.37 SF_VIP_P2.25 | length 1887.5
  Top Layer w10: v1(1599,-446) 1599,-336 SF_VIP_P2.25@1640,-295
  Bottom Layer w10: DEx_GPIO_P1.37@35,-464 1581,-464 v1(1599,-446) ; DEx_GPIO_P1.37@45.27,-474.27 cw(c70.07,-499.07) 70.07,-464 cw(c70.07,-428.93) DEx_GPIO_P1.37@45.27,-453.73 ; DEx_GPIO_P1.37@52.34,-481.34 cw(c94.21,-523.21) 94.21,-464 cw(c94.21,-404.79) DEx_GPIO_P1.37@52.34,-446.66
GPIO_1_33: DEx_GPIO_P1.38 SF_VIP_P2.26 | length 2296.8
  Bottom Layer w10: DEx_GPIO_P1.38@-65,-464 -115,-414 -115,-320 -90,-295 340.47,-295 390,-344.53 1072.97,-344.53 1090,-327.5 1090,-165 1109.53,-145.47 1590.47,-145.47 SF_VIP_P2.26@1640,-195 ; SF_VIP_P2.26@1615.47,-195 ccw(c1556.26,-195) 1598.13,-153.13 ccw(c1640,-111.26) SF_VIP_P2.26@1640,-170.47 ; SF_VIP_P2.26@1625.47,-195 ccw(c1590.4,-195) 1615.2,-170.2 ccw(c1640,-145.4) SF_VIP_P2.26@1640,-180.47
GPIO_1_34: DEx_GPIO_P1.39 SF_VIP_P2.27 | length 2090.3
  Bottom Layer w10: DEx_GPIO_P1.39@35,-388.53 cw(c35,-447.74) 76.87,-405.87 cw(c118.74,-364) DEx_GPIO_P1.39@59.53,-364 ; DEx_GPIO_P1.39@35,-378.53 cw(c35,-413.6) 59.8,-388.8 cw(c84.6,-364) DEx_GPIO_P1.39@49.53,-364 ; DEx_GPIO_P1.39@35,-364 108,-437 1167,-437 1249,-355 1680,-355 SF_VIP_P2.27@1740,-295 ; SF_VIP_P2.27@1715.47,-295 cw(c1656.26,-295) 1698.13,-336.87 cw(c1740,-378.74) SF_VIP_P2.27@1740,-319.53 ; SF_VIP_P2.27@1725.47,-295 cw(c1690.4,-295) 1715.2,-319.8 cw(c1740,-344.6) SF_VIP_P2.27@1740,-309.53
GPIO_1_35: DEx_GPIO_P1.40

## Polygon pours and split planes (outlines as drawn)
GND on Bottom Layer "BotLayer-GND" (solid, remove dead copper, pour order 1000): 2760,-2660 2760,240 -320,240 -320,-2660 2760,-2660
GND on Top Layer "TopLayer-GND" (solid, remove dead copper, pour order 1001): 2760,-2660 2760,240 -320,240 -320,-2660 2760,-2660

## Keep-outs
Keep-Out Layer:
  lines w10: -320,-2660 -320,-80 -320,60 -140,240 0,240 340,240 2320,240 2560,240 2760,40 2760,-2660 -320,-2660

## Silkscreen, mask and mechanical layers (free items; w line width, h text height)
Top Overlay:
  text "Smardorn&Yuki @SHU" at -105,-2615 h60

## Text inside footprints (layer, text, board x,y; h text height)
DEx_GPIO_P0: Top Overlay "1" at 2260,-360 h50 r270; Top Overlay "40" at 2640,-2240 h50 r270
DEx_GPIO_P1: Top Overlay "1" at 160,-2340 h50 r90; Top Overlay "2" at -180,-2320 h50 r90
SF_VIP_P0: Top Overlay "1" at 1700,-740 h50 r270
SF_VIP_P1: Top Overlay "1" at 740,-2340 h50 r90
SF_VIP_P2: Top Overlay "1" at 320,-400 h50